# Altium PCB HandlebarTouchFPCB_RIGHT_v1.2.PcbDoc
Units mm, origin at the board's own origin, x right, y up, seen from the top; angles counter-clockwise.
Board outline 211.72 x 83.52 mm, 2 copper layers (Top Layer, Bottom Layer); 5 components, 10 nets, 28 pads, 29 vias.
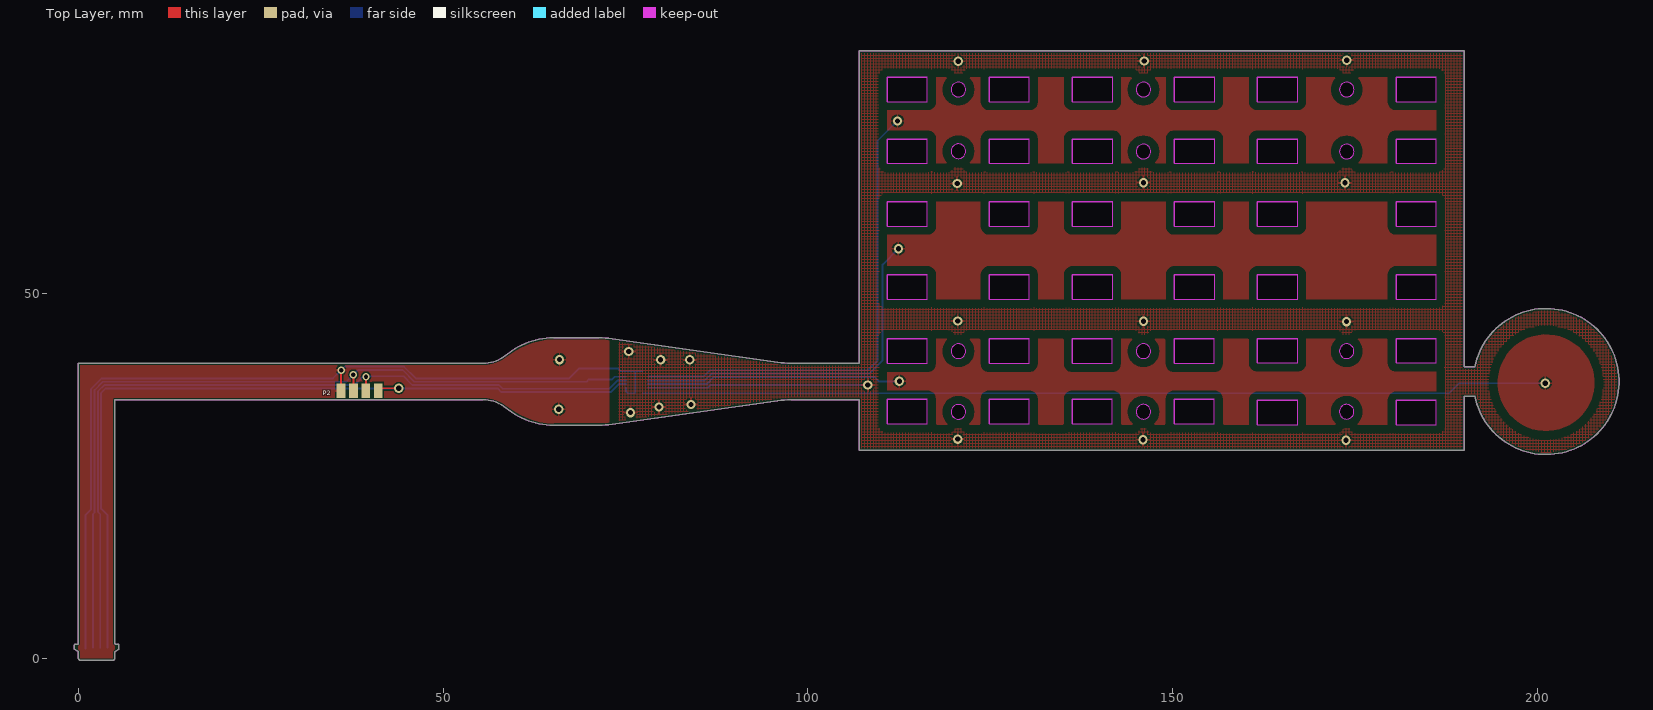
[diagram p0: Top Layer view]
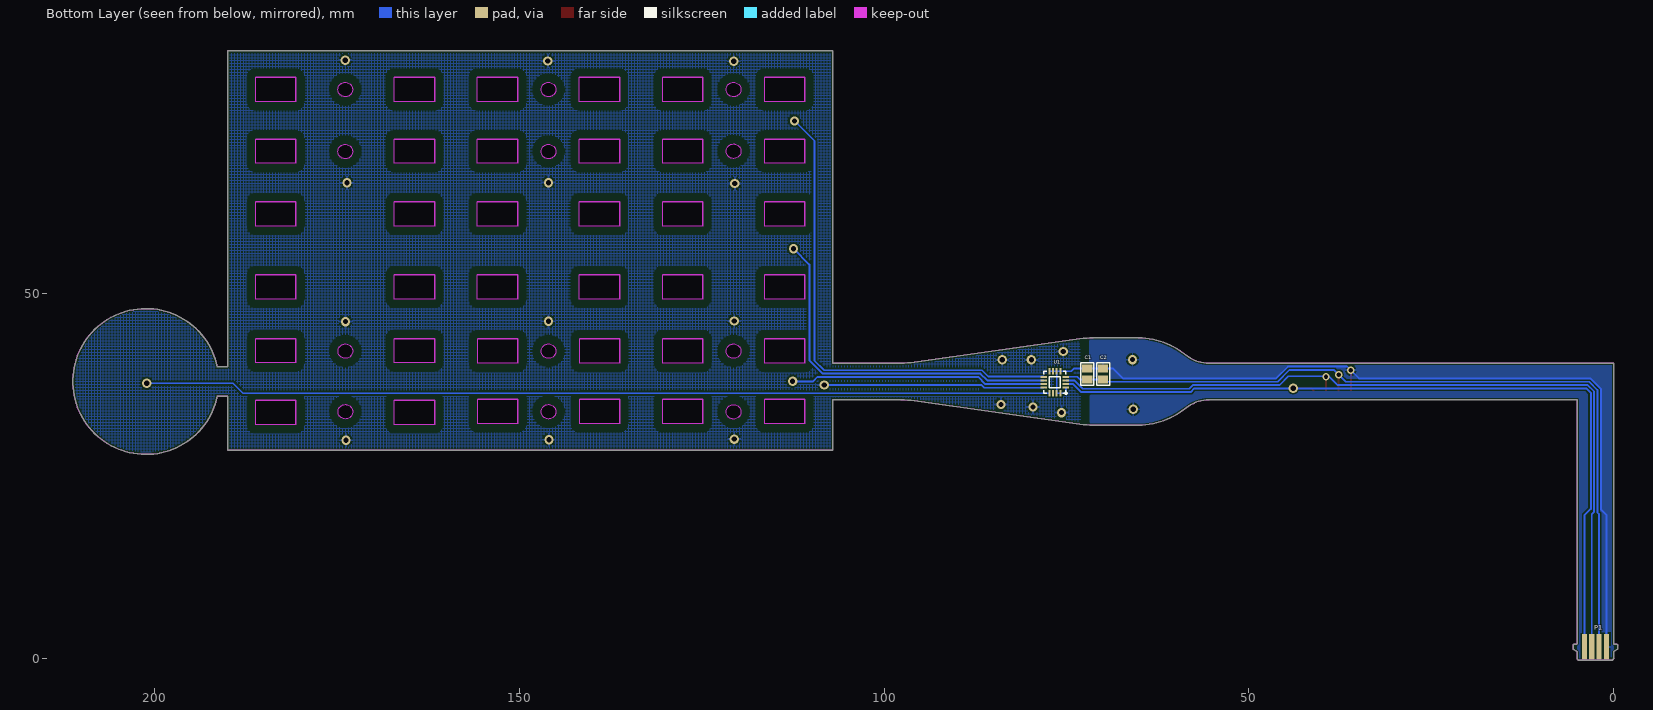
[diagram p1: Bottom Layer view, seen from below]

## Layer stack, top to bottom
Top Solder: solder mask 0.0102, Solder Resist, Dk 3.5
Top Layer: signal copper 0.0356
Dielectric 1: dielectric 0.32, FR-4, Dk 4.8
Bottom Layer: signal copper 0.0356
Bottom Solder: solder mask 0.0102, Solder Resist, Dk 3.5

## Board outline
0,0 0,0.8 ccw(c-0.15,0.8) -0.076,0.93 -0.55,1.2 -0.55,1.75 cw(c-0.4,1.75) -0.4,1.9 -0.15,1.9 ccw(c-0.15,2.05) 0,2.05 0,40.411 55.424,40.411 ccw(c55.424,45.411) 58.291,41.315 59.418,42.103 cw(c65.152,33.911) 65.152,43.911 71.303,43.911 cw(c71.303,33.911) 72.69,43.814 96.31,40.507 ccw(c97.697,50.411) 97.697,40.411 107,40.411 107,83.223 189.975,83.223 189.975,39.911 191.377,39.911 cw(c201.175,37.911) 191.377,35.911 189.975,35.911 189.975,28.471 107,28.46 107,35.411 97.697,35.411 ccw(c97.697,25.411) 96.31,35.314 72.69,32.007 cw(c71.303,41.911) 71.303,31.911 65.152,31.911 cw(c65.152,41.911) 59.418,33.718 58.291,34.507 ccw(c55.424,30.411) 55.424,35.411 5,35.411 5,2.05 ccw(c5.15,2.05) 5.15,1.9 5.4,1.9 cw(c5.4,1.75) 5.55,1.75 5.55,1.2 5.076,0.93 ccw(c5.15,0.8) 5,0.8 5,0 cw(c4.7,0) 4.7,-0.3 0.3,-0.3 cw(c0.3,0)
cut-out: 110.861,32.132 116.361,32.132 116.361,35.487 110.861,35.487
cut-out: 110.861,40.392 116.361,40.392 116.361,43.747 110.861,43.747
cut-out: 110.88,49.205 116.38,49.205 116.38,52.532 110.88,52.532
cut-out: 110.88,59.205 116.38,59.205 116.38,62.532 110.88,62.532
cut-out: 110.88,67.805 116.38,67.805 116.38,71.132 110.88,71.132
cut-out: 110.88,76.265 116.38,76.265 116.38,79.592 110.88,79.592
cut-out: 119.614,33.75 ccw(c120.614,33.75) 120.614,32.75 ccw(c120.614,33.75) 121.614,33.75 ccw(c120.614,33.75) 120.614,34.75 ccw(c120.614,33.75)
cut-out: 119.614,42.07 ccw(c120.614,42.07) 120.614,41.07 ccw(c120.614,42.07) 121.614,42.07 ccw(c120.614,42.07) 120.614,43.07 ccw(c120.614,42.07)
cut-out: 119.614,69.472 ccw(c120.614,69.472) 120.614,68.472 ccw(c120.614,69.472) 121.614,69.472 ccw(c120.614,69.472) 120.614,70.472 ccw(c120.614,69.472)
cut-out: 119.614,77.929 ccw(c120.614,77.929) 120.614,76.929 ccw(c120.614,77.929) 121.614,77.929 ccw(c120.614,77.929) 120.614,78.929 ccw(c120.614,77.929)
cut-out: 124.821,32.132 130.321,32.132 130.321,35.487 124.821,35.487
cut-out: 124.821,40.392 130.321,40.392 130.321,43.747 124.821,43.747
cut-out: 124.849,49.205 130.349,49.205 130.349,52.532 124.849,52.532
cut-out: 124.849,59.205 130.349,59.205 130.349,62.532 124.849,62.532
cut-out: 124.849,67.805 130.349,67.805 130.349,71.132 124.849,71.132
cut-out: 124.849,76.265 130.349,76.265 130.349,79.592 124.849,79.592
cut-out: 136.231,32.132 141.731,32.132 141.731,35.487 136.231,35.487
cut-out: 136.231,40.392 141.731,40.392 141.731,43.747 136.231,43.747
cut-out: 136.25,49.205 141.75,49.205 141.75,52.532 136.25,52.532
cut-out: 136.25,59.205 141.75,59.205 141.75,62.532 136.25,62.532
cut-out: 136.25,67.805 141.75,67.805 141.75,71.132 136.25,71.132
cut-out: 136.25,76.265 141.75,76.265 141.75,79.592 136.25,79.592
cut-out: 144.981,33.768 ccw(c145.981,33.768) 145.981,32.768 ccw(c145.981,33.768) 146.981,33.768 ccw(c145.981,33.768) 145.981,34.768 ccw(c145.981,33.768)
cut-out: 144.981,42.07 ccw(c145.981,42.07) 145.981,41.07 ccw(c145.981,42.07) 146.981,42.07 ccw(c145.981,42.07) 145.981,43.07 ccw(c145.981,42.07)
cut-out: 144.981,69.431 ccw(c145.981,69.431) 145.981,68.431 ccw(c145.981,69.431) 146.981,69.431 ccw(c145.981,69.431) 145.981,70.431 ccw(c145.981,69.431)
cut-out: 144.981,77.929 ccw(c145.981,77.929) 145.981,76.929 ccw(c145.981,77.929) 146.981,77.929 ccw(c145.981,77.929) 145.981,78.929 ccw(c145.981,77.929)
cut-out: 150.191,32.132 155.691,32.132 155.691,35.487 150.191,35.487
cut-out: 150.191,40.392 155.691,40.392 155.691,43.747 150.191,43.747
cut-out: 150.219,49.205 155.719,49.205 155.719,52.532 150.219,52.532
cut-out: 150.219,59.205 155.719,59.205 155.719,62.532 150.219,62.532
cut-out: 150.219,67.805 155.719,67.805 155.719,71.132 150.219,71.132
cut-out: 150.219,76.265 155.719,76.265 155.719,79.592 150.219,79.592
cut-out: 161.6,32.005 167.1,32.005 167.1,35.332 161.6,35.332
cut-out: 161.6,40.465 167.1,40.465 167.1,43.792 161.6,43.792
cut-out: 161.6,49.205 167.1,49.205 167.1,52.532 161.6,52.532
cut-out: 161.6,59.205 167.1,59.205 167.1,62.532 161.6,62.532
cut-out: 161.6,67.805 167.1,67.805 167.1,71.132 161.6,71.132
cut-out: 161.6,76.265 167.1,76.265 167.1,79.592 161.6,79.592
cut-out: 172.831,33.768 ccw(c173.831,33.768) 173.831,32.768 ccw(c173.831,33.768) 174.831,33.768 ccw(c173.831,33.768) 173.831,34.768 ccw(c173.831,33.768)
cut-out: 172.831,42.07 ccw(c173.831,42.07) 173.831,41.07 ccw(c173.831,42.07) 174.831,42.07 ccw(c173.831,42.07) 173.831,43.07 ccw(c173.831,42.07)
cut-out: 172.837,69.431 ccw(c173.837,69.431) 173.837,68.431 ccw(c173.837,69.431) 174.837,69.431 ccw(c173.837,69.431) 173.837,70.431 ccw(c173.837,69.431)
cut-out: 172.837,77.929 ccw(c173.837,77.929) 173.837,76.929 ccw(c173.837,77.929) 174.837,77.929 ccw(c173.837,77.929) 173.837,78.929 ccw(c173.837,77.929)
cut-out: 180.619,32.005 186.119,32.005 186.119,35.332 180.619,35.332
cut-out: 180.619,40.465 186.119,40.465 186.119,43.792 180.619,43.792
cut-out: 180.619,49.205 186.119,49.205 186.119,52.532 180.619,52.532
cut-out: 180.619,59.205 186.119,59.205 186.119,62.532 180.619,62.532
cut-out: 180.619,67.805 186.119,67.805 186.119,71.132 180.619,71.132
cut-out: 180.619,76.265 186.119,76.265 186.119,79.592 180.619,79.592

## Design rules (kind name [scope] priority, off if disabled: settings)
Clearance Clearance_connector [InComponent('P1') vs OnLayer('Keep-Out Layer')] p1: gap=0 ignorepadtopadclearanceinfootprint=FALSE
Clearance [All] p2: gap=0.254 ignorepadtopadclearanceinfootprint=FALSE except(0: Arc-Hole Track-Hole SMDPad-Hole THPad-Hole Via-Hole Fill-Hole Poly-Hole Region-Hole Text-Hole; 0.203: Arc-Arc Arc-Track Arc-SMDPad Track-Track Track-SMDPad SMDPad-SMDPad SMDPad-THPad SMDPad-Via SMDPad-Fill SMDPad-Poly SMDPad-Region SMDPad-Text; 1.2: Fill-Fill Fill-Poly Fill-Region Poly-Poly Poly-Region Region-Region)
PolygonConnect [All] p1: connectstyle=Relief reliefconductorwidth=0.254 reliefentries=4 polygonreliefangle="90 Angle" airgapwidth=0.254
RoutingVias [All] p1: holewidth=0.711 width=1.27 viastyle="Through Hole" minholewidth=0.711 minwidth=1.27 maxholewidth=0.711 maxwidth=1.27
SolderMaskExpansion [All] p1: expansion=0.102
Width [All] p1: maxlimit=0.254 minlimit=0.254 preferedwidth=0.254
30 further rules are at their usual default settings.

## Components (designator, comment, footprint, x,y, rotation, side; value= is the part's Value field where it differs from the comment)
C1 "Cap" "CAP 0805 b" 72.136,38.952 r270 bottom value=0.1uF
C2 "Cap" "CAP 0805 b" 69.977,38.952 r270 bottom value=1uF
P1 "Header 4" FPCB_4_CONNECTOR 1,1.538 r0 bottom
P2 "Header 4" 4PAD_CONNECTOR_SHORT 35.994,36.666 r0 top
U1 "CAP1298" "QFN-COL 16 (3x3)  V2" 76.581,37.809 r0 bottom

## Footprints (in the part's own frame and the unit in brackets; to place one, negate y for a bottom-side part, rotate by r counter-clockwise, add the part's x,y. Pads: shape width x height; smd on the part's side, far side on the other; paste and mask are expansions set on the pad)
4PAD_CONNECTOR_SHORT [mm]
  rect 1.2x2 smd: 1(0,0) 2(1.7,0) 3(3.4,0) 4(5.1,0)
"CAP 0805 b" [mm] "Chip Capacitor, Body 2.0x1.3mm, IPC High Density"
  rect 1.1x1.4 smd: 1(-0.75,0) 2(0.75,0)
  silkscreen extent -1.52,-0.89 1.52,0.89, body extent -1.03,-0.65 0.97,0.66, height 0.73
FPCB_4_CONNECTOR [mm]
  rect 0.7x3.5 smd: 1(0,0) 2(1,0) 3(2,0) 4(3,0)
"QFN-COL 16 (3x3)  V2" [mm] "PQFN, 16-Leads, Body 3.5x3.5mm, Pitch 0.5mm, NSC Recommended"
  rect 0.9x0.28 smd mask+0.051: 1(-1.5,0.75) 2(-1.5,0.25) 3(-1.5,-0.25) 4(-1.5,-0.75) 9(1.5,-0.75) 10(1.5,-0.25) 11(1.5,0.25) 12(1.5,0.75)
  rect 0.28x0.9 smd mask+0.051: 5(-0.75,-1.5) 6(-0.25,-1.5) 7(0.25,-1.5) 8(0.75,-1.5) 13(0.75,1.5) 14(0.25,1.5) 15(-0.25,1.5) 16(-0.75,1.5)
  silkscreen extent -1.65,-1.5 1.5,1.65, body extent -1.52,-1.52 1.52,1.52, height 1.1

## Part data
C1: library part "Cap Semi", "YAGEO (PHYCOMP)  CC0805KRX7R8BB104  COND, CERÁ MULT, X7R, 100NF, 25V, 0805", Supplier Part Number 1=644249, LatestRevisionDate=29-May-2009, LatestRevisionNote="IPC-7351 Footprint Added.", PackageDescription="Chip Capacitor", PackageReference=C1206, Published=8-Jun-2000, Publisher="Altium Limited", Supplier 1=Farnell
C2: library part "Cap Semi", "TAIYO YUDEN  TMK212BJ105KG-T  COND, CERÁ MULT, X5R, 1UF, 25V, 0805", Supplier Part Number 1=2112855, LatestRevisionDate=29-May-2009, LatestRevisionNote="IPC-7351 Footprint Added.", PackageDescription="Chip Capacitor", PackageReference=C1206, Published=8-Jun-2000, Publisher="Altium Limited", Supplier 1=Farnell
P1 P2: "Header, 4-Pin", LatestRevisionDate=17-Jul-2002, LatestRevisionNote="Re-released for DXP Platform.", Publisher="Altium Limited"
U1: Supplier Part Number 1=2373292, Supplier 1=Farnell

## Via types
v1: diameter 1.27, hole 0.711, Top Layer to Bottom Layer, 26 vias
v2: diameter 1, hole 0.6, Top Layer to Bottom Layer, 3 vias

## Nets (pads, with @x,y where several pads share a name; then routed paths per layer and width w, separated by ;. In a path a pad name is that pad's centre, name@x,y a point inside that pad or via, vN(x,y) a via of type N, cw(c..) or ccw(c..) an arc to the next point about the centre after c; other vN are vias at no path point)
5V: C1.2 C2.2 P1.2 P2.2 U1.4 | length 112.5
  Top Layer w0.254: P2.2 v2(37.694,38.85)
  Bottom Layer w0.254: P1.2@2,1.473 P1.2 2,19.743 2.21,19.953 2.21,36.728 3.367,37.885 36.728,37.885 v2(37.694,38.85) 38.354,39.511 44.425,39.511 46.05,37.885 69.66,37.885 C2.2 C1.2 73.164,38.202 73.521,38.559 U1.4
GND: C1.1 C2.1 P1.1 P2.1 U1.1 U1.5 U1.6 U1.7 U1.8 U1.15 U1.16 | length 121.9
  Top Layer w0.254: P2.1 36.017,36.689 v2(36.017,39.46)
  Bottom Layer w0.254: P1.1@1,1.295 P1.1 1,19.632 1.753,20.384 1.753,36.918 3.177,38.342 34.9,38.342 v2(36.017,39.46) 36.525,39.968 44.614,39.968 46.24,38.342 67.259,38.342 68.619,39.702 C2.1 C1.1 73.926,39.702 74.319,39.309 U1.5 U1.6 ; U1.1 75.081,36.515 75.287,36.309 U1.16 U1.15 U1.6 ; U1.8 U1.7 U1.6
  other v1: 65.837,34.1 65.938,40.908
Pad_1: U1.9 | length 66.3
  Bottom Layer w0.254: U1.9 78.121,38.599 85.709,38.599 86.57,39.46 108.204,39.46 109.525,40.781 109.525,70.88 v1(112.268,73.623)
Pad_2: U1.10 | length 49.5
  Bottom Layer w0.254: U1.10 85.848,38.059 86.792,39.003 108.393,39.003 110.236,40.845 110.236,53.938 v1(112.395,56.097)
Pad_3: U1.11 | length 35.1
  Bottom Layer w0.254: U1.11 86.11,37.559 87.097,38.545 109.118,38.545 109.728,37.936 v1(112.522,37.936)
Pad_4: U1.13 | length 124.3
  Bottom Layer w0.254: U1.13 187.857,36.309 189.23,37.682 v1(201.041,37.682)
Pad_5: U1.14
SCL: P1.3 P2.3 U1.3 | length 111.6
  Top Layer w0.254: P2.3 39.421,36.693 v2(39.421,38.571)
  Bottom Layer w0.254: P1.3@3,1.397 P1.3 3,19.696 2.667,20.029 2.667,36.539 3.556,37.428 37.831,37.428 39.025,38.622 44.602,38.622 45.796,37.428 57.67,37.428 58.178,36.92 72.771,36.92 73.91,38.059 U1.3
SDA: P1.4 P2.4 U1.2 | length 111.1
  Top Layer w0.254: P2.4 41.424,36.996 v1(43.917,36.996)
  Bottom Layer w0.254: P1.4@4,1.448 P1.4 4,19.585 3.124,20.461 3.124,36.349 3.745,36.971 57.48,36.971 57.988,36.463 72.96,36.463 74.057,37.559 U1.2
SignalGuard: U1.12 | length 30.3
  Bottom Layer w0.254: U1.12 86.257,37.059 86.626,37.428 v1(108.204,37.428)
  other v1: 173.736,29.859 145.923,29.935 120.523,30.011 75.667,33.643 79.57,34.405 83.97,34.761 79.807,40.882 83.795,40.882 75.438,42.025 173.812,46.115 145.974,46.165 120.523,46.216 120.447,65.038 173.609,65.139 145.974,65.165 120.599,81.804 146.075,81.852 173.838,81.954

## Polygon pours and split planes (outlines as drawn)
GND on Top Layer (solid, pour order 36): 0,-0.3 0,16.598 0,16.942 0,17.179 0,17.399 0,17.611 0,17.761 0,40.411 56.196,40.411 57.917,41.053 60.302,42.656 61.306,43.141 62.36,43.513 63.472,43.769 64.618,43.911 72,43.911 73.914,43.564 73.914,32.397 73.914,32.195 72.183,31.93 69.548,31.873 65.024,31.912 63.6,32.032 62.865,32.195 62.184,32.397 60.562,33.026 58.518,34.349 58.216,34.582 57.985,34.705 57.76,34.838 57.451,34.981 56.896,35.218 55.988,35.411 5,35.411 5,17.761 5,17.526 5,17.374 5,17.12 5,16.786 5,16.529 5,-0.3
no net on Top Layer (solid, pour order 32): 0.127,15.457
SignalGuard on Top Layer (hatched 90Degree grid 0.4 track 0.1, pour order 24): 74.295,43.59 74.041,43.336 74.041,32.151 96.407,35.411 109.6,35.269 109.6,40.411 97,40.411
SignalGuard on Top Layer (hatched 90Degree grid 0.4 track 0.1, pour order 20): 187.244,39.804 187.221,39.781 187.221,35.938 193.405,35.938 193.421,35.922 193.421,39.804
SignalGuard on Top Layer (hatched 90Degree grid 0.4 track 0.1, pour order 18): 210.439,34.126 ccw(c201.226,37.945) 192.013,41.764 ccw(c201.226,37.945)
Pad_4 on Top Layer (solid, pour order 14): 207.391,35.523 ccw(c201.168,37.747) 194.945,39.97 ccw(c201.168,37.747)
SignalGuard on Top Layer (hatched 90Degree grid 0.4 track 0.1, pour order 16): 107,83.223 107,28.46 107.011,28.471 189.975,28.471 189.975,83.223
Pad_1 on Top Layer (solid, pour order 8): 110.88,79.592 110.88,67.805 186.119,67.805 186.119,79.592
Pad_2 on Top Layer (solid, pour order 6): 110.88,62.532 110.88,49.205 186.119,49.205 186.119,62.532
no net on Top Layer (solid, pour order 4): 169.291,23.331
Pad_3 on Top Layer (solid, pour order 2): 110.861,43.747 110.861,32.132 110.989,32.005 186.119,32.005 186.119,43.792
GND on Bottom Layer (solid, remove dead copper, pour order 30): 0,-0.3 0,16.598 0,16.942 0,17.221 0,17.374 0,17.577 0,17.761 0,40.411 56.196,40.411 57.917,41.053 60.302,42.656 61.306,43.141 62.36,43.513 63.472,43.769 64.618,43.911 72,43.911 73.914,43.564 73.914,32.397 73.914,32.195 72.183,31.93 69.548,31.873 65.024,31.912 63.6,32.032 62.865,32.195 62.184,32.397 60.562,33.026 58.518,34.349 58.216,34.582 57.985,34.705 57.76,34.838 57.451,34.981 56.896,35.218 55.988,35.411 5,35.411 5,19.634 5,17.602 5,17.45 5,17.272 5,16.942 5,16.565 5,-0.3 3.2,-0.3
SignalGuard on Bottom Layer (hatched 90Degree grid 0.4 track 0.1, pour order 26): 107,40.411 107,83.223 189.975,83.223 189.975,39.911 191.377,39.911 191.377,35.911 189.975,35.911 189.975,28.471 184.15,28.47 107.011,28.471 106.903,35.314 97,35.411 73.031,32.061 73.152,43.75 96.523,40.512
SignalGuard on Bottom Layer (hatched 90Degree grid 0.4 track 0.1, pour order 28): 200.499,47.938 ccw(c201.384,37.822) 191.951,34.062 ccw(c201.144,38.096) 208.324,31.08 ccw(c200.938,37.897)

## Keep-outs
Keep-Out Layer:
  circle w0.013: c173.837,69.431 r1
  circle w0.013: c145.981,42.07 r1
  circle w0.013: c120.614,42.07 r1
  circle w0.013: c145.981,69.431 r1
  circle w0.013: c145.981,77.929 r1
  circle w0.013: c120.614,33.75 r1
  circle w0.013: c120.614,77.929 r1
  circle w0.013: c173.837,77.929 r1
  circle w0.013: c145.981,33.768 r1
  circle w0.013: c120.614,69.472 r1
  circle w0.013: c173.831,42.07 r1
  circle w0.013: c173.831,33.768 r1
  lines w0.013: -0.55,1.2 -0.55,1.75 cw(c-0.4,1.75) -0.4,1.9 -0.15,1.9 ccw(c-0.15,2.05) 0,2.05 0,40.411 55.424,40.411 ccw(c55.424,45.411) 58.291,41.315 59.418,42.103 cw(c65.152,33.911) 65.152,43.911 71.303,43.911 cw(c71.303,33.911) 72.69,43.814 96.31,40.507 ccw(c97.697,50.411) 97.697,40.411 107,40.411 107,83.223 189.975,83.223 189.975,39.911 191.377,39.911 cw(c201.175,37.911) 191.377,35.911 189.975,35.911 189.975,28.471 107,28.46 107,35.411 97.697,35.411 ccw(c97.697,25.411) 96.31,35.314 72.69,32.007 cw(c71.303,41.911) 71.303,31.911 65.152,31.911 cw(c65.152,41.911) 59.418,33.718 58.291,34.507 ccw(c55.424,30.411) 55.424,35.411 5,35.411 5,2.05 ccw(c5.15,2.05) 5.15,1.9 5.4,1.9 cw(c5.4,1.75) 5.55,1.75 5.55,1.2 5.076,0.93 ccw(c5.15,0.8) 5,0.8 5,0 cw(c4.7,0) 4.7,-0.3 0.3,-0.3 cw(c0.3,0) 0,0 0,0.8 ccw(c-0.15,0.8) -0.076,0.93 -0.55,1.2 ; 110.861,32.132 116.361,32.132 116.361,35.487 110.861,35.487 110.861,32.132 ; 110.861,40.392 116.361,40.392 116.361,43.747 110.861,43.747 110.861,40.392 ; 110.88,49.205 110.88,52.532 116.38,52.532 116.38,49.205 110.88,49.205 ; 110.88,59.205 110.88,62.532 116.38,62.532 116.38,59.205 110.88,59.205 ; 110.88,67.805 116.38,67.805 116.38,71.132 110.88,71.132 110.88,67.805 ; 110.88,76.265 116.38,76.265 116.38,79.592 110.88,79.592 110.88,76.265 ; 124.821,32.132 124.821,35.487 130.321,35.487 130.321,32.132 124.821,32.132 ; 124.821,40.392 130.321,40.392 130.321,43.747 124.821,43.747 124.821,40.392 ; 124.849,49.205 124.849,52.532 130.349,52.532 130.349,49.205 124.849,49.205 ; 124.849,59.205 124.849,62.532 130.349,62.532 130.349,59.205 124.849,59.205 ; 124.849,67.805 130.349,67.805 130.349,71.132 124.849,71.132 124.849,67.805 ; 124.849,76.265 130.349,76.265 130.349,79.592 124.849,79.592 124.849,76.265 ; 136.231,32.132 141.731,32.132 141.731,35.487 136.231,35.487 136.231,32.132 ; 136.231,40.392 141.731,40.392 141.731,43.747 136.231,43.747 136.231,40.392 ; 136.25,49.205 136.25,52.532 141.75,52.532 141.75,49.205 136.25,49.205 ; 136.25,59.205 136.25,62.532 141.75,62.532 141.75,59.205 136.25,59.205 ; 136.25,67.805 141.75,67.805 141.75,71.132 136.25,71.132 136.25,67.805 ; 136.25,76.265 141.75,76.265 141.75,79.592 136.25,79.592 136.25,76.265 ; 150.191,32.132 150.191,35.487 155.691,35.487 155.691,32.132 150.191,32.132 ; 150.191,40.392 150.191,43.747 155.691,43.747 155.691,40.392 150.191,40.392 ; 150.219,49.205 150.219,52.532 155.719,52.532 155.719,49.205 150.219,49.205 ; 150.219,59.205 150.219,62.532 155.719,62.532 155.719,59.205 150.219,59.205 ; 150.219,67.805 155.719,67.805 155.719,71.132 150.219,71.132 150.219,67.805 ; 150.219,76.265 155.719,76.265 155.719,79.592 150.219,79.592 150.219,76.265 ; 161.6,32.005 167.1,32.005 167.1,35.332 161.6,35.332 161.6,32.005 ; 161.6,40.465 167.1,40.465 167.1,43.792 161.6,43.792 161.6,40.465 ; 161.6,49.205 161.6,52.532 167.1,52.532 167.1,49.205 161.6,49.205 ; 161.6,59.205 161.6,62.532 167.1,62.532 167.1,59.205 161.6,59.205 ; 161.6,67.805 167.1,67.805 167.1,71.132 161.6,71.132 161.6,67.805 ; 161.6,76.265 161.6,79.592 167.1,79.592 167.1,76.265 161.6,76.265 ; 180.619,32.005 186.119,32.005 186.119,35.332 180.619,35.332 180.619,32.005 ; 180.619,40.465 180.619,43.792 186.119,43.792 186.119,40.465 180.619,40.465 ; 180.619,49.205 180.619,52.532 186.119,52.532 186.119,49.205 180.619,49.205 ; 180.619,59.205 180.619,62.532 186.119,62.532 186.119,59.205 180.619,59.205 ; 180.619,67.805 186.119,67.805 186.119,71.132 180.619,71.132 180.619,67.805 ; 180.619,76.265 186.119,76.265 186.119,79.592 180.619,79.592 180.619,76.265